# Altium PCB LED Control Board.PcbDoc
Units mm, origin at the board's own origin, x right, y up, seen from the top; angles counter-clockwise.
Board outline 152.4 x 101.6 mm, 2 copper layers (Top Layer, Bottom Layer); 35 components, 138 nets, 342 pads, 0 vias.
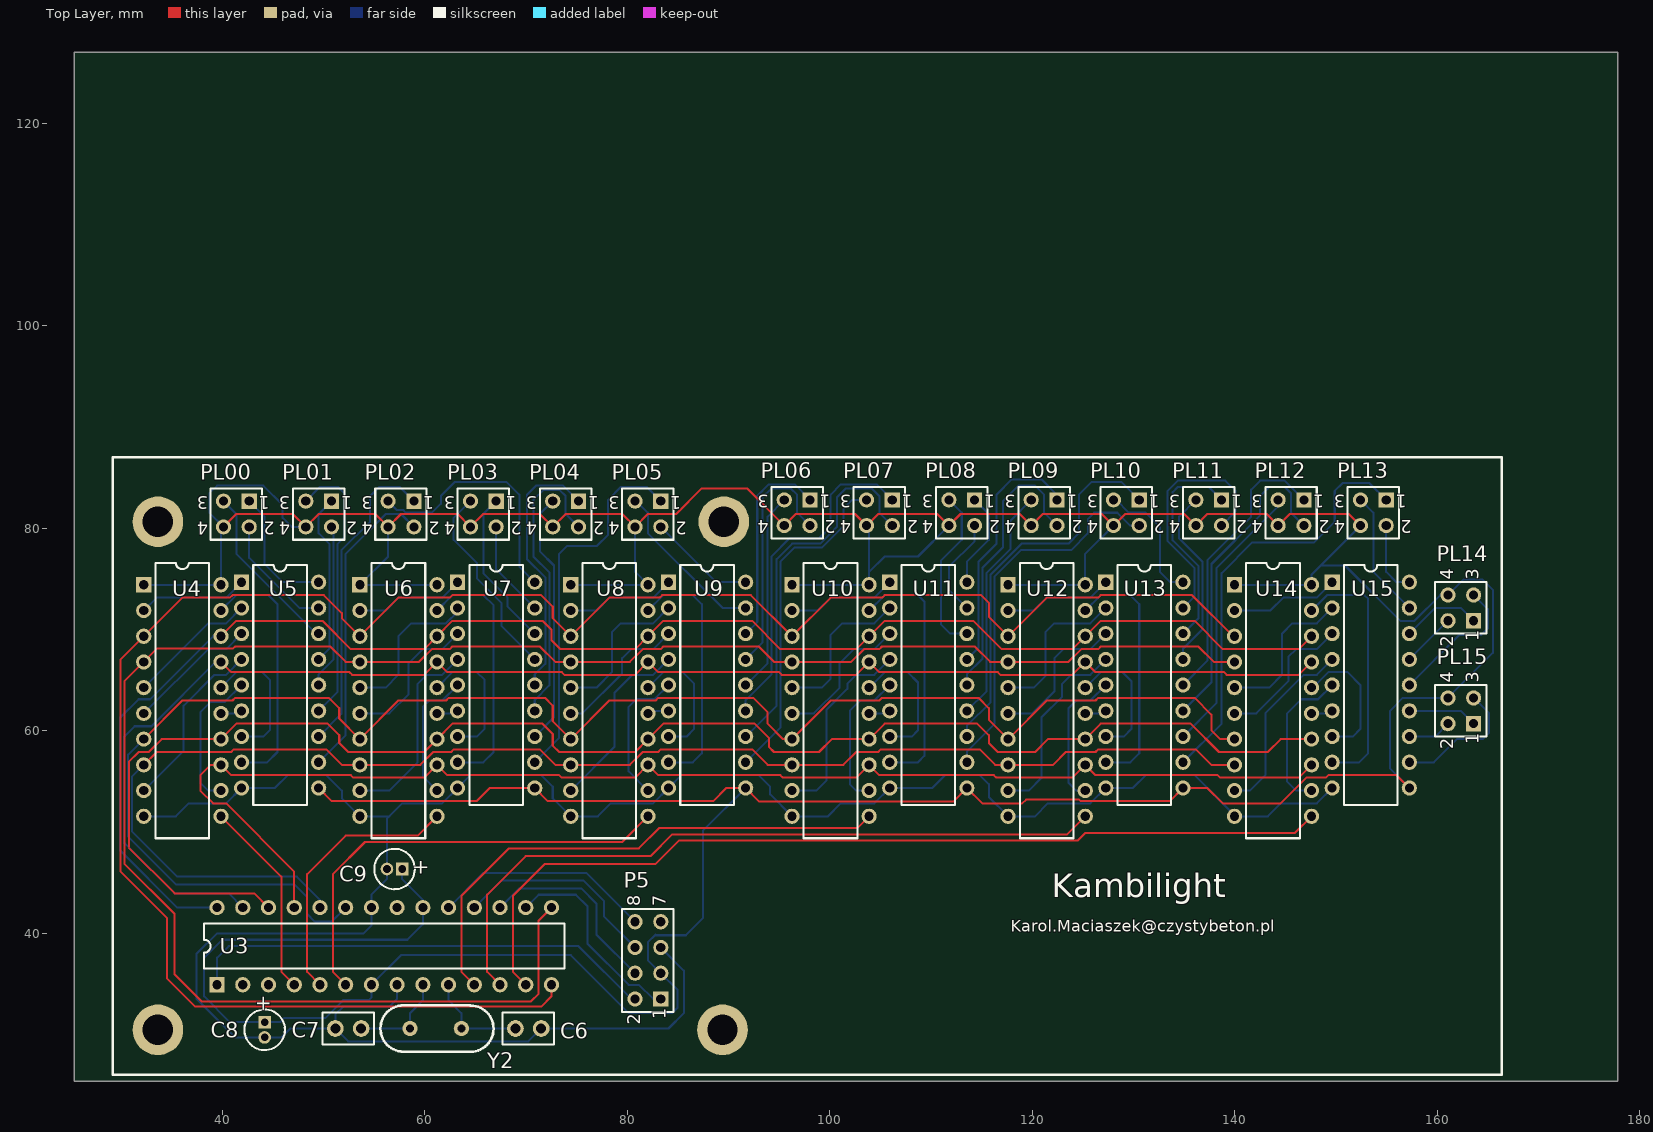
[diagram p0: Top Layer view]
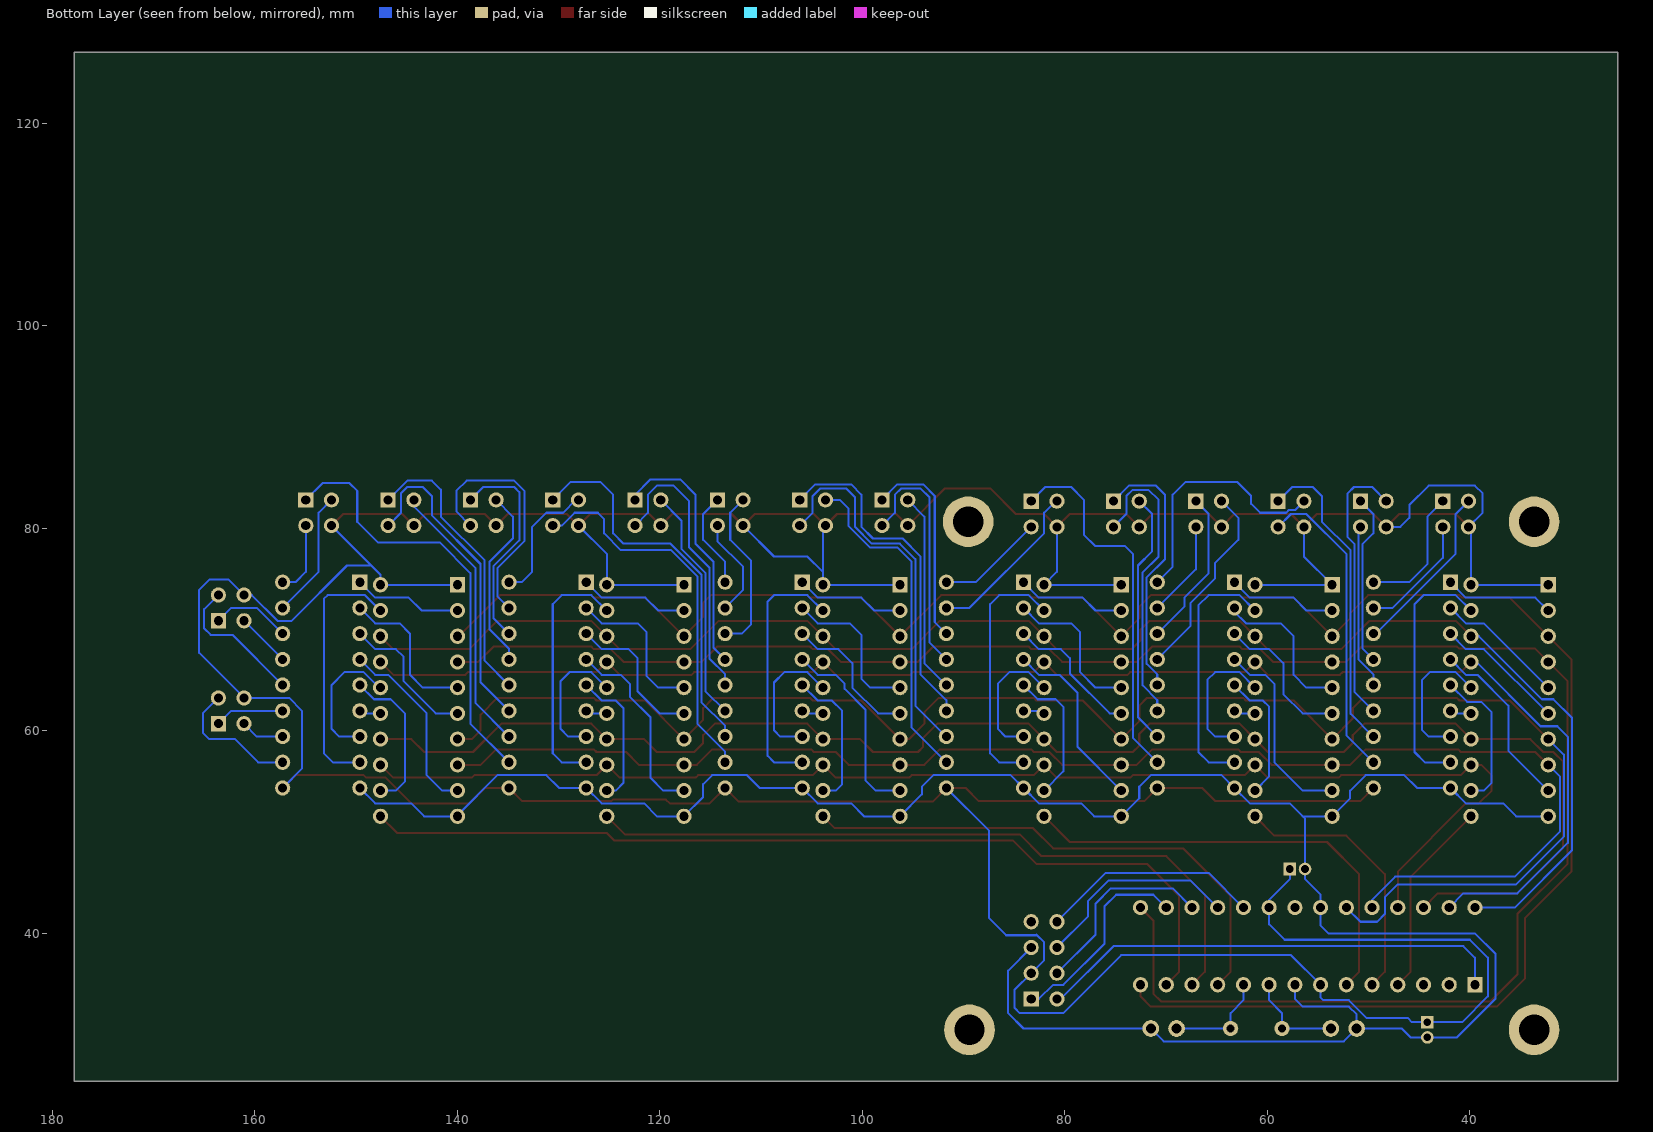
[diagram p1: Bottom Layer view, seen from below]

## Layer stack, top to bottom
Top Layer: signal copper 0.0356
Dielectric: dielectric 0.32, FR-4, Dk 4.8
Bottom Layer: signal copper 0.0356

## Board outline
25.4,25.4 177.8,25.4 177.8,127 25.4,127

## Design rules (kind name [scope] priority, off if disabled: settings)
Clearance [All] p1: gap=0.2
PolygonConnect [All] p1: connectstyle=Relief reliefconductorwidth=0.254 reliefentries=4 polygonreliefangle="90 Angle"
RoomDefinition "LED Control A4-A7" [InComponentClass('LED Control A4-A7')] p1: confinementstyle=ConfineIn formatcopy=TRUE lockcomponents=FALSE outline 89.027,48.387 158.496,48.387 158.496,78.232 89.027,78.232
RoomDefinition "LED Control A0-A3" [InComponentClass('LED Control A0-A3')] p2: confinementstyle=ConfineIn formatcopy=TRUE lockcomponents=FALSE outline 30.226,48.514 115.189,48.514 115.189,78.232 30.226,78.232
RoomDefinition "LED Connectors" [InComponentClass('LED Connectors')] p3: confinementstyle=ConfineIn formatcopy=TRUE lockcomponents=FALSE outline 36.957,57.404 165.735,57.404 165.735,88.011 36.957,88.011
RoomDefinition "LED Circuit" [InComponentClass('LED Circuit')] p4: confinementstyle=ConfineIn formatcopy=TRUE lockcomponents=FALSE outline 31.496,26.416 86.487,26.416 86.487,49.149 31.496,49.149
RoutingVias [All] p1: holewidth=0.711 width=1.27 viastyle="Through Hole" minholewidth=0.711 minwidth=1.27 maxholewidth=0.711 maxwidth=1.27
SilkscreenOverComponentPads [All] p1: minsilkscreentomaskgap=0.254
SolderMaskExpansion [All] p1: expansion=0.102
Width [All] p1: maxlimit=0.2 minlimit=0.1 preferedwidth=0.2
27 further rules are at their usual default settings.

## Classes and differential pairs
component class "USB Circuit": C2 C3 C4 C5 D1 D2 P1 P2 P4 R1 R2 R3 U1 Y1
component class Reset: R4 SW1
component class Power: C1 D3 D4 P3 U2
component class "LED Circuit": C6 C7 C8 C9 P5 U3 Y2
component class "LED Connectors": PL00 PL01 PL02 PL03 PL04 PL05 PL06 PL07 PL08 PL09 PL10 PL11 PL12 PL13 PL14 PL15
component class "LED Control A0-A3": U4 U5 U6 U7 U8 U9 U10 U11
component class "LED Control A4-A7": U12 U13 U14 U15

## Components (designator, comment, footprint, x,y, rotation, side; value= is the part's Value field where it differs from the comment)
C6 "Cap" CAPR2.54-5.1x3.2 70.231,30.607 r0 top
C7 "Cap" CAPR2.54-5.1x3.2 52.451,30.607 r180 top
C8 "Cap Pol1" CAPPR1.5-4x5 44.196,30.48 r270 top
C9 "Cap Pol1" CAPPR1.5-4x5 57.023,46.355 r180 top
P5 "Header 4X2" HDR2X4 83.312,33.528 r90 top
PL00 "Header 2X2" HDR2X2 42.672,82.677 r180 top
PL01 "Header 2X2" HDR2X2 50.8,82.677 r180 top
PL02 "Header 2X2" HDR2X2 58.928,82.677 r180 top
PL03 "Header 2X2" HDR2X2 67.056,82.677 r180 top
PL04 "Header 2X2" HDR2X2 75.184,82.677 r180 top
PL05 "Header 2X2" HDR2X2 83.312,82.677 r180 top
PL06 "Header 2X2" HDR2X2 98.044,82.804 r180 top
PL07 "Header 2X2" HDR2X2 106.172,82.804 r180 top
PL08 "Header 2X2" HDR2X2 114.3,82.804 r180 top
PL09 "Header 2X2" HDR2X2 122.428,82.804 r180 top
PL10 "Header 2X2" HDR2X2 130.556,82.804 r180 top
PL11 "Header 2X2" HDR2X2 138.684,82.804 r180 top
PL12 "Header 2X2" HDR2X2 146.812,82.804 r180 top
PL13 "Header 2X2" HDR2X2 154.94,82.804 r180 top
PL14 "Header 2X2" HDR2X2 163.576,70.866 r90 top
PL15 "Header 2X2" HDR2X2 163.576,60.706 r90 top
U3 "ATmega8L-8PI" 28P3 56.007,38.735 r0 top
U4 "MC74HCT273AN" 738-03 36.068,62.992 r270 top
U5 "ULN2803A" DIP18 45.72,64.516 r270 top
U6 "MC74HCT273AN" 738-03 57.404,62.992 r270 top
U7 "ULN2803A" DIP18 67.056,64.516 r270 top
U8 "MC74HCT273AN" 738-03 78.232,62.992 r270 top
U9 "ULN2803A" DIP18 87.884,64.516 r270 top
U10 "MC74HCT273AN" 738-03 100.076,62.992 r270 top
U11 "ULN2803A" DIP18 109.728,64.516 r270 top
U12 "MC74HCT273AN" 738-03 121.412,62.992 r270 top
U13 "ULN2803A" DIP18 131.064,64.516 r270 top
U14 "MC74HCT273AN" 738-03 143.764,62.992 r270 top
U15 "ULN2803A" DIP18 153.416,64.516 r270 top
Y2 "XTAL" "Crystal Oscillator" 61.087,30.607 r0 top

## Footprints (in the part's own frame and the unit in brackets; to place one, negate y for a bottom-side part, rotate by r counter-clockwise, add the part's x,y. Pads: shape width x height; smd on the part's side, far side on the other; paste and mask are expansions set on the pad)
28P3 [mm] "DIP; 28 Leads; Row Spacing 7.62 mm; Pitch 2.54 mm"
  rect 1.5x1.5 hole 0.9: 1(-16.51,-3.81)
  round 1.5 hole 0.9: 2(-13.97,-3.81) 3(-11.43,-3.81) 4(-8.89,-3.81) 5(-6.35,-3.81) 6(-3.81,-3.81) 7(-1.27,-3.81) 8(1.27,-3.81) 9(3.81,-3.81) 10(6.35,-3.81) 11(8.89,-3.81) 12(11.43,-3.81) 13(13.97,-3.81) 14(16.51,-3.81) 15(16.51,3.81) 16(13.97,3.81) 17(11.43,3.81) 18(8.89,3.81) 19(6.35,3.81) 20(3.81,3.81) 21(1.27,3.81) 22(-1.27,3.81) 23(-3.81,3.81) 24(-6.35,3.81) 25(-8.89,3.81) 26(-11.43,3.81) 27(-13.97,3.81) 28(-16.51,3.81)
  silkscreen extent -17.78,-2.22 17.78,2.22
738-03 [mm] "DIP; 20 Leads; Row Spacing 7.62 mm; Pitch 2.54 mm"
  rect 1.5x1.5 hole 0.9: 1(-11.43,-3.81)
  round 1.5 hole 0.9: 2(-8.89,-3.81) 3(-6.35,-3.81) 4(-3.81,-3.81) 5(-1.27,-3.81) 6(1.27,-3.81) 7(3.81,-3.81) 8(6.35,-3.81) 9(8.89,-3.81) 10(11.43,-3.81) 11(11.43,3.81) 12(8.89,3.81) 13(6.35,3.81) 14(3.81,3.81) 15(1.27,3.81) 16(-1.27,3.81) 17(-3.81,3.81) 18(-6.35,3.81) 19(-8.89,3.81) 20(-11.43,3.81)
  silkscreen extent -13.6,-2.65 13.6,2.65
CAPPR1.5-4x5 [mm] "Capacitor, Electrolytic, Radial; Body 4 x 5 mm (Dia.xH typ); Pin Spacing 1.5 mm (typ)"
  rect 1.25x1.25 hole 0.75: 1(-0.75,0)
  round 1.25 hole 0.75: 2(0.75,0)
  silkscreen extent -2,-2 2,2
CAPR2.54-5.1x3.2 [mm] "Capacitor, Ceramic, Thru-Hole, Dipped Radial; Body 5.1 x 3.2 mm (WxT) Pin Spacing 2.54 mm (typ)"
  round 1.65 hole 1: 1(-1.27,0) 2(1.27,0)
  silkscreen extent -2.55,-1.6 2.55,1.6
"Crystal Oscillator" [mil]
  round 60 hole 30: 1(-100,0) 2(100,0)
  silkscreen extent -215,-91 225,90
DIP18 [mm] "DIP; 18 Leads; Row Spacing 7.62 mm; Pitch 2.54 mm"
  rect 1.5x1.5 hole 0.9: 1(-10.16,-3.81)
  round 1.5 hole 0.9: 2(-7.62,-3.81) 3(-5.08,-3.81) 4(-2.54,-3.81) 5(0,-3.81) 6(2.54,-3.81) 7(5.08,-3.81) 8(7.62,-3.81) 9(10.16,-3.81) 10(10.16,3.81) 11(7.62,3.81) 12(5.08,3.81) 13(2.54,3.81) 14(0,3.81) 15(-2.54,3.81) 16(-5.08,3.81) 17(-7.62,3.81) 18(-10.16,3.81)
  silkscreen extent -11.85,-2.65 11.85,2.65
HDR2X2 [mm] "Connector; Header; 2x2 Position"
  rect 1.5x1.5 hole 0.9: 1(0,0)
  round 1.5 hole 0.9: 2(0,2.54) 3(2.54,0) 4(2.54,2.54)
  silkscreen extent -1.27,-1.27 3.81,3.81
HDR2X4 [mm] "Connector; Header; 4x2 Position"
  rect 1.5x1.5 hole 0.9: 1(0,0)
  round 1.5 hole 0.9: 2(0,2.54) 3(2.54,0) 4(2.54,2.54) 5(5.08,0) 6(5.08,2.54) 7(7.62,0) 8(7.62,2.54)
  silkscreen extent -1.27,-1.27 8.89,3.81

## Part data
C6 C7: "Capacitor"
C8 C9: "Polarized Capacitor (Radial)"
P5: "Header, 4-Pin, Dual row"
PL00 PL01 PL02 PL03 PL04 PL05 PL06 PL07 PL08 PL09 PL10 PL11 PL12 PL13 PL14 PL15: "Header, 2-Pin, Dual row"
U3: "8-Bit AVR Microcontroller with 8K Bytes of In-System Programmable Flash Memory"
U4 U6 U8 U10 U12 U14: "Octal D-Type Flip-Flop with Common Clock and Reset with LSTTL-Compatible Inputs"
U5 U7 U9 U11 U13 U15: "Eight Darlington Array"
Y2: library part "Crystal Oscillator"

## Free pads (board coordinates)
  round 5 hole 3: 0(33.655,30.48) 1(33.655,80.645) 2(89.408,30.48) 3(89.535,80.645)

## Nets (pads, with @x,y where several pads share a name; then routed paths per layer and width w, separated by ;. In a path a pad name is that pad's centre, name@x,y a point inside that pad or via, vN(x,y) a via of type N, cw(c..) or ccw(c..) an arc to the next point about the centre after c; other vN are vias at no path point)
GND: C6.2 C7.2 C8.2 C9.2 P5.5 U3.8 U3.22 U4.10 U5.9 U6.10 U7.9 U8.10 U9.9 U10.10 U11.9 U12.10 U13.9 U14.10 U15.9 | length 240.8
  Bottom Layer w0.2: U4.10 35.433,51.562 36.703,52.832 40.386,52.832 U5.9 45.212,54.356 46.482,55.626 50.292,55.626 51.816,54.102 51.816,53.34 U6.10 56.515,51.562 ; C8.2@44.196,29.718 41.275,29.718 37.465,33.528 37.465,37.973 39.497,40.005 53.975,40.005 54.737,40.767 U3.22 54.737,43.815 56.273,45.351 C9.2 56.273,51.32 56.515,51.562 ; C8.2 45.859,29.73 46.736,30.607 C7.2 ; U3.8 57.277,33.528 56.515,32.766 51.943,32.766 51.181,32.004 C7.2 ; P5.5 85.598,36.322 85.598,32.131 84.074,30.607 C6.2 70.231,29.337 52.451,29.337 C7.2 ; U15.9 148.082,52.832 144.526,52.832 143.256,51.562 U14.10 139.954,51.689 136.017,55.626 131.191,55.626 129.921,54.356 U13.9 125.73,52.832 121.539,52.832 120.269,51.562 U12.10 115.697,53.467 115.697,54.737 114.808,55.626 111.379,55.626 110.109,54.356 U11.9 104.394,52.832 101.092,52.832 99.822,51.562 U10.10 94.107,53.721 94.107,54.483 92.964,55.626 85.344,55.626 U9.9 82.55,52.832 78.359,52.832 77.089,51.562 U8.10 72.644,53.34 72.644,54.483 71.501,55.626 64.516,55.626 U7.9 61.722,52.832 57.785,52.832 56.515,51.562
NetC1_1: 
NetC2_1: 
NetC3_1: 
NetC6_1: C6.1 U3.10 Y2.2 | length 10.2
  Bottom Layer w0.2: U3.10 62.357,33.401 63.627,32.131 Y2.2 C6.1
NetC7_1: C7.1 U3.9 Y2.1 | length 9.7
  Bottom Layer w0.2: C7.1 Y2.1 58.547,32.131 59.817,33.401 U3.9
NetD1_2: 
NetD2_2: 
NetD3_A: 
NetD4_K: 
NetP1_1: 
NetP1_2: 
NetP4_1: 
NetP4_2: 
NetP4_4: 
NetP4_6: 
NetP4_8: 
NetP5_1: P5.1 U3.16 | length 20.3
  Bottom Layer w0.2: U3.16 71.247,43.815 74.93,43.815 76.073,42.672 76.073,38.989 80.137,34.925 81.153,34.925 82.55,33.528 P5.1
NetP5_2: P5.2 U3.1 | length 46.6
  Bottom Layer w0.2: U3.1 39.497,37.592 40.64,38.735 75.184,38.735 80.391,33.528 P5.2
NetP5_4: P5.4 U3.17 | length 19.4
  Bottom Layer w0.2: U3.17 69.342,44.45 75.438,44.45 76.962,42.926 76.962,39.878 P5.4
NetP5_6: P5.6 U3.18 | length 20.6
  Bottom Layer w0.2: U3.18 67.564,45.212 75.692,45.212 77.724,43.18 77.724,41.656 P5.6
NetP5_8: P5.8 U3.19 | length 21.8
  Bottom Layer w0.2: U3.19 65.786,45.974 75.946,45.974 P5.8
NetPL00_1: PL00.1 U5.18 | length 12.9
  Bottom Layer w0.2: PL00.1 44.196,81.153 44.196,76.454 45.974,74.676 U5.18
NetPL00_2: PL00.2 U5.17 | length 12
  Bottom Layer w0.2: PL00.2 42.672,77.089 47.625,72.136 U5.17
NetPL00_3: PL00.3 U5.16 | length 17.1
  Bottom Layer w0.2: PL00.3 41.402,81.407 41.402,77.47 49.276,69.596 U5.16
NetPL01_1: PL01.1 U5.15 | length 17
  Bottom Layer w0.2: U5.15 50.58,68.106 50.58,78.452 49.53,79.502 49.53,81.407 PL01.1
NetPL01_2: PL01.2 U5.14 | length 16
  Bottom Layer w0.2: U5.14 49.53,65.571 50.98,67.021 PL01.2@50.98,79.957
NetPL01_3: PL01.3 U5.13 | length 27.2
  Bottom Layer w0.2: PL01.3 49.657,84.074 51.435,84.074 52.07,83.439 52.07,79.121 51.38,78.431 51.38,63.826 U5.13
NetPL02_1: PL02.1 U5.12 | length 31.1
  Bottom Layer w0.2: U5.12 51.78,61.686 51.78,77.815 54.61,80.645 54.61,83.185 55.499,84.074 57.531,84.074 PL02.1
NetPL02_2: PL02.2 U5.11 | length 30.6
  Bottom Layer w0.2: U5.11 52.197,59.563 52.197,77.47 56.134,81.407 57.658,81.407 PL02.2
NetPL02_3: PL02.3 U7.18 | length 24.9
  Bottom Layer w0.2: PL02.3 57.258,81.807 57.874,81.807 58.147,81.534 60.706,81.534 61.595,82.423 61.595,83.185 62.992,84.582 68.072,84.582 69.342,83.312 69.342,76.2 U7.18
NetPL03_1: PL03.1 U7.16 | length 15.7
  Bottom Layer w0.2: PL03.1 65.786,81.407 65.786,75.565 68.199,73.152 68.199,72.263 U7.16
NetPL03_2: PL03.2 U7.17 | length 9.6
  Bottom Layer w0.2: PL03.2 67.056,75.946 U7.17
NetPL03_3: PL03.3 U7.15 | length 19.6
  Bottom Layer w0.2: PL03.3 62.865,81.026 62.865,78.867 65.151,76.581 65.151,75.057 67.564,72.644 67.564,70.358 U7.15
NetPL04_1: PL04.1 U7.14 | length 26.1
  Bottom Layer w0.2: U7.14 70.866,65.571 71.916,66.621 71.916,75.15 70.104,76.962 70.104,83.312 70.993,84.201 73.66,84.201 PL04.1
NetPL04_2: PL04.2 U7.13 | length 29.5
  Bottom Layer w0.2: U7.13 70.866,63.031 72.316,64.481 72.316,75.639 70.739,77.216 70.739,82.804 71.736,83.801 73.298,83.801 73.914,83.185 73.914,81.407 PL04.2
NetPL04_3: PL04.3 U7.12 | length 25.1
  Bottom Layer w0.2: U7.12 72.771,61.341 72.771,76.327 71.374,77.724 71.374,81.407 PL04.3
NetPL05_1: PL05.1 U7.11 | length 36.9
  Bottom Layer w0.2: U7.11 73.279,59.309 73.279,77.47 74.041,78.232 76.962,78.232 78.105,79.375 78.105,82.804 79.375,84.074 81.915,84.074 PL05.1
NetPL05_2: PL05.2 U9.18 | length 10.6
  Bottom Layer w0.2: PL05.2 88.773,74.676 U9.18
NetPL05_3: PL05.3 U9.17 | length 16.5
  Bottom Layer w0.2: PL05.3 80.899,82.677 82.042,81.534 82.042,79.502 89.408,72.136 U9.17
NetPL06_1: PL06.1 U9.16 | length 20.4
  Bottom Layer w0.2: U9.16 92.837,70.739 92.837,83.185 93.98,84.328 96.52,84.328 PL06.1
NetPL06_2: PL06.2 U9.15 | length 24.3
  Bottom Layer w0.2: U9.15 93.345,68.707 93.345,83.039 94.224,83.918 96.168,83.918 96.774,83.312 96.774,81.534 PL06.2
NetPL06_3: PL06.3 U9.14 | length 19.9
  Bottom Layer w0.2: U9.14 93.853,66.675 93.853,81.153 PL06.3
NetPL07_1: PL07.1 U9.13 | length 33.7
  Bottom Layer w0.2: U9.13 91.694,63.031 94.253,65.59 94.253,77.235 96.012,78.994 98.933,78.994 100.076,80.137 100.076,83.312 101.092,84.328 104.648,84.328 PL07.1
NetPL07_2: PL07.2 U9.12 | length 37.3
  Bottom Layer w0.2: U9.12 94.742,62.484 94.742,76.943 96.285,78.486 99.06,78.486 100.711,80.137 100.711,83.058 101.581,83.928 104.159,83.928 104.902,83.185 104.902,81.534 PL07.2
NetPL07_3: PL07.3 U9.11 | length 33.3
  Bottom Layer w0.2: U9.11 95.142,60.344 95.142,76.727 96.501,78.086 99.226,78.086 101.346,80.206 101.346,81.915 102.235,82.804 PL07.3
NetPL08_1: PL08.1 U11.18 | length 9.6
  Bottom Layer w0.2: U11.18 113.538,76.708 115.697,78.867 115.697,81.407 PL08.1
NetPL08_2: PL08.2 U11.17 | length 9.9
  Bottom Layer w0.2: U11.17 111.76,73.914 111.76,76.2 114.3,78.74 PL08.2
NetPL08_3: PL08.3 U11.16 | length 16.6
  Bottom Layer w0.2: PL08.3 113.03,81.534 113.03,78.867 110.998,76.835 110.998,70.485 111.887,69.596 U11.16
NetPL09_1: PL09.1 U11.15 | length 25.2
  Bottom Layer w0.2: U11.15 114.681,68.199 114.681,76.708 116.459,78.486 116.459,83.312 117.983,84.836 120.904,84.836 122.428,83.312 PL09.1
NetPL09_2: PL09.2 U11.14 | length 28.3
  Bottom Layer w0.2: U11.14 113.538,65.571 115.081,67.114 115.081,76.092 117.094,78.105 117.094,82.677 118.618,84.201 120.269,84.201 121.158,83.312 121.158,81.534 PL09.2
NetPL09_3: PL09.3 U11.13 | length 23.5
  Bottom Layer w0.2: U11.13 115.481,63.919 115.481,75.603 117.856,77.978 117.856,80.772 PL09.3
NetPL10_1: PL10.1 U11.12 | length 38.4
  Bottom Layer w0.2: U11.12 113.538,60.491 115.881,62.834 115.881,75.437 118.93,78.486 123.571,78.486 124.587,79.502 124.587,83.312 125.857,84.582 128.778,84.582 PL10.1
NetPL10_2: PL10.2 U11.11 | length 37.7
  Bottom Layer w0.2: U11.11 113.538,57.951 116.281,60.694 116.281,75.26 118.872,77.851 123.825,77.851 125.476,79.502 125.476,80.899 126.111,81.534 128.397,81.534 129.667,80.264 PL10.2
NetPL10_3: PL10.3 U13.18 | length 12.8
  Bottom Layer w0.2: PL10.3 128.27,82.804 129.54,81.534 131.191,81.534 132.588,80.137 132.588,75.692 133.604,74.676 U13.18
NetPL11_1: PL11.1 U13.16 | length 21.2
  Bottom Layer w0.2: U13.16 136.417,71.139 136.417,76.258 133.858,78.817 133.858,83.566 134.366,84.074 137.414,84.074 PL11.1
NetPL11_2: PL11.2 U13.17 | length 24.7
  Bottom Layer w0.2: U13.17 136.017,73.279 136.017,76.073 133.35,78.74 133.35,83.693 134.366,84.709 139.065,84.709 140.081,83.693 140.081,81.661 PL11.2
NetPL11_3: PL11.3 U13.15 | length 18.2
  Bottom Layer w0.2: U13.15 134.874,68.111 136.817,70.054 136.817,76.67 134.493,78.994 134.493,81.153 PL11.3
NetPL12_1: PL12.1 U13.14 | length 28.5
  Bottom Layer w0.2: U13.14 137.287,66.929 137.287,76.835 141.605,81.153 141.605,83.82 142.494,84.709 144.907,84.709 PL12.1
NetPL12_2: PL12.2 U13.13 | length 31.7
  Bottom Layer w0.2: U13.13 137.687,64.789 137.687,76.473 142.494,81.28 142.494,83.185 143.383,84.074 144.907,84.074 145.542,83.439 145.542,81.534 PL12.2
NetPL12_3: PL12.3 U13.12 | length 27.3
  Bottom Layer w0.2: U13.12 138.176,62.738 138.176,76.073 144.272,82.169 PL12.3
NetPL13_1: PL13.1 U13.11 | length 42.7
  Bottom Layer w0.2: U13.11 138.684,60.706 138.684,75.565 141.732,78.613 147.828,78.613 149.86,80.645 149.86,83.693 150.622,84.455 153.289,84.455 PL13.1
NetPL13_2: PL13.2 U15.18 | length 7.3
  Bottom Layer w0.2: PL13.2 154.94,75.692 155.956,74.676 U15.18
NetPL13_3: PL13.3 U15.17 | length 12.7
  Bottom Layer w0.2: PL13.3 153.67,81.534 153.67,75.692 U15.17
NetPL14_1: PL14.1 U15.16 | length 7.9
  Bottom Layer w0.2: U15.16 159.766,72.136 162.306,72.136 PL14.1
NetPL14_2: PL14.2 U15.15 | length 5.4
  Bottom Layer w0.2: U15.15 PL14.2
NetPL14_3: PL14.3 U15.14 | length 13.9
  Bottom Layer w0.2: U15.14 162.179,69.469 164.338,69.469 164.973,70.104 164.973,72.009 PL14.3
NetPL15_1: PL15.1 U15.13 | length 6.9
  Bottom Layer w0.2: U15.13 162.306,61.976 PL15.1
NetPL15_2: PL15.2 U15.12 | length 4.3
  Bottom Layer w0.2: U15.12 159.766,59.436 PL15.2
NetPL15_3: PL15.3 U15.11 | length 13.1
  Bottom Layer w0.2: U15.11 159.639,56.896 161.925,59.182 164.465,59.182 165.1,59.817 165.1,61.722 PL15.3
NetR1_2: 
NetR2_1: 
NetR3_2: 
NetU3_2: U3.2
NetU3_3: U3.3
NetU3_4: U3.4 U4.11 | length 19.6
  Top Layer w0.2: U4.11 45.847,45.593 45.847,36.195 U3.4
NetU3_5: U3.5 U6.11 | length 26.6
  Top Layer w0.2: U3.5 48.387,36.195 48.387,45.847 52.197,49.657 59.309,49.657 U6.11
NetU3_6: U3.6 U8.11 | length 44.9
  Top Layer w0.2: U3.6 50.927,36.195 50.927,45.847 54.102,49.022 79.502,49.022 U8.11
NetU3_11: U3.11 U10.11 | length 52.8
  Top Layer w0.2: U3.11 63.627,36.195 63.627,43.688 68.326,48.387 81.153,48.387 83.185,50.419 102.743,50.419 U10.11
NetU3_12: U3.12 U12.11 | length 71.7
  Top Layer w0.2: U3.12 66.167,36.195 66.167,43.815 69.977,47.625 82.296,47.625 84.455,49.784 123.444,49.784 U12.11
NetU3_13: U3.13 U14.11 | length 91.4
  Top Layer w0.2: U3.13 68.707,36.195 68.707,43.688 71.882,46.863 82.804,46.863 85.09,49.149 124.46,49.149 125.222,49.911 145.923,49.911 U14.11
NetU3_14: U3.14 U4.3 U6.3 U8.3 U10.3 U12.3 U14.3 | length 203.6
  Top Layer w0.2: U3.14 72.517,33.782 71.501,32.766 37.338,32.766 34.544,35.56 34.544,41.529 29.953,46.12 29.953,67.037 U4.3 36.068,73.152 40.767,73.152 41.021,73.406 50.038,73.406 51.816,71.628 51.816,71.12 U6.3 57.404,73.152 62.484,73.152 62.738,73.406 71.501,73.406 72.644,72.263 72.644,71.12 U8.3 78.232,73.152 83.185,73.152 83.439,73.406 92.202,73.406 U10.3 100.076,73.152 105.156,73.152 105.41,73.406 114.935,73.406 115.697,72.644 115.697,71.247 U12.3 121.412,73.152 126.492,73.152 126.746,73.406 135.763,73.406 139.827,69.342 U14.3
NetU3_15: U3.15 U4.4 U6.4 U8.4 U10.4 U12.4 U14.4 | length 194.1
  Top Layer w0.2: U3.15 71.247,41.275 71.247,34.036 70.485,33.274 37.973,33.274 35.306,35.941 35.306,41.91 30.353,46.863 30.353,64.897 U4.4 33.562,68.106 41.055,68.106 41.275,68.326 50.673,68.326 52.197,66.802 U6.4 59.436,66.802 60.706,68.072 62.484,68.072 62.738,68.326 71.374,68.326 72.898,66.802 U8.4 80.264,66.802 81.534,68.072 83.312,68.072 83.566,68.326 92.964,68.326 94.488,66.802 U10.4 102.108,66.802 103.378,68.072 104.902,68.072 105.156,68.326 114.3,68.326 115.824,66.802 U12.4 123.571,66.802 124.841,68.072 126.492,68.072 126.746,68.326 136.398,68.326 137.922,66.802 U14.4
NetU3_23: U3.23 U4.7 U6.7 U8.7 U10.7 U12.7 U14.7 | length 165
  Top Layer w0.2: U4.7 36.068,62.992 41.021,62.992 41.275,63.246 50.546,63.246 51.562,62.23 51.562,61.214 U6.7 57.404,62.992 62.103,62.992 62.357,63.246 71.882,63.246 72.644,62.484 72.644,60.96 U8.7 78.232,62.992 82.804,62.992 83.058,63.246 92.456,63.246 93.853,61.849 93.853,60.706 95.377,59.182 U10.7 100.076,62.992 104.902,62.992 105.156,63.246 114.681,63.246 115.697,62.23 115.697,61.087 U12.7 121.412,62.992 126.238,62.992 126.492,63.246 136.017,63.246 137.668,61.595 137.668,60.071 138.557,59.182 U14.7
  Bottom Layer w0.2: U4.7 30.715,57.639 30.715,49.549 35.433,44.831 47.117,44.831 48.387,43.561 48.387,41.91 49.149,41.148 50.8,41.148 U3.23
NetU3_24: U3.24 U4.8 U6.8 U8.8 U10.8 U12.8 U14.8 | length 143.4
  Top Layer w0.2: U4.8 33.528,57.912 40.894,57.912 41.148,58.166 50.292,58.166 51.816,56.642 U6.8 59.563,56.642 60.833,57.912 62.611,57.912 62.865,58.166 71.374,58.166 72.898,56.642 U8.8 ; U8.8@74.295,56.769 U8.8 ; U14.8 137.668,56.642 136.144,58.166 126.492,58.166 126.238,57.912 123.317,57.912 122.047,56.642 U12.8 116.332,56.642 114.808,58.166 105.029,58.166 104.775,57.912 102.616,57.912 101.346,56.642 U10.8 93.853,56.642 92.329,58.166 83.312,58.166 83.058,57.912 81.534,57.912 80.264,56.642 U8.8
  Bottom Layer w0.2: U4.8 31.115,55.499 31.115,50.038 35.56,45.593 47.371,45.593 49.657,43.307 U3.24
NetU3_25: U3.25 U4.13 U6.13 U8.13 U10.13 U12.13 U14.13 | length 133.1
  Top Layer w0.2: U3.25 47.117,46.101 40.386,52.832 39.116,52.832 37.846,54.102 37.846,55.626 38.862,56.642 U4.13 40.894,55.626 52.705,55.626 52.959,55.372 59.944,55.372 U6.13 62.23,55.626 73.279,55.626 73.533,55.372 80.772,55.372 U8.13 83.058,55.626 95.123,55.626 95.377,55.372 102.616,55.372 U10.13 104.902,55.626 116.205,55.626 116.459,55.372 123.952,55.372 U12.13 126.238,55.626 138.303,55.626 138.557,55.372 146.304,55.372 U14.13
NetU3_26: U3.26 U4.14 U6.14 U8.14 U10.14 U12.14 U14.14 | length 156.1
  Top Layer w0.2: 30.797,48.45 35.306,43.942 43.18,43.942 U3.26 ; 30.797,48.578 30.797,56.959 31.75,57.912 32.766,57.912 34.036,59.182 U4.14 41.402,60.706 50.419,60.706 51.562,59.563 51.562,58.801 52.451,57.912 59.944,57.912 U6.14 62.738,60.706 71.628,60.706 72.644,59.69 72.644,58.547 73.279,57.912 80.772,57.912 U8.14 83.566,60.706 92.583,60.706 93.98,59.309 93.98,58.42 94.488,57.912 98.933,57.912 100.203,59.182 U10.14 105.41,60.706 114.554,60.706 115.697,59.563 115.697,58.801 116.586,57.912 120.269,57.912 121.539,59.182 U12.14 126.746,60.706 135.636,60.706 138.43,57.912 143.256,57.912 144.526,59.182 U14.14 U14.14@147.574,59.055
NetU3_27: U3.27 U4.17 U6.17 U8.17 U10.17 U12.17 U14.17 | length 150.4
  Top Layer w0.2: U4.17 40.894,65.786 52.578,65.786 52.832,65.532 59.944,65.532 U6.17 62.23,65.786 73.533,65.786 73.787,65.532 80.772,65.532 U8.17 83.058,65.786 94.996,65.786 95.25,65.532 102.616,65.532 U10.17 104.902,65.786 116.586,65.786 116.84,65.532 123.952,65.532 U12.17 126.238,65.786 138.938,65.786 139.192,65.532 146.304,65.532 U14.17
  Bottom Layer w0.2: U4.17 39.37,66.802 33.02,60.452 31.369,60.452 30.315,59.398 30.315,48.933 35.306,43.942 40.64,43.942 U3.27
NetU3_28: U3.28 U4.18 U6.18 U8.18 U10.18 U12.18 U14.18 | length 158.1
  Top Layer w0.2: U4.18 41.402,70.866 49.911,70.866 52.705,68.072 59.944,68.072 U6.18 62.738,70.866 71.628,70.866 72.517,69.977 72.517,68.961 73.406,68.072 80.772,68.072 U8.18 83.566,70.866 92.329,70.866 95.123,68.072 102.616,68.072 U10.18 105.41,70.866 114.173,70.866 116.967,68.072 123.952,68.072 U12.18 126.746,70.866 136.017,70.866 138.811,68.072 146.304,68.072 U14.18
  Bottom Layer w0.2: 29.915,48.19 29.915,61.284 31.75,63.119 32.893,63.119 39.116,69.342 U4.18 ; 29.972,48.133 35.56,42.545 U3.28
NetU4_2: U4.2 U5.1 | length 10.8
  Bottom Layer w0.2: U4.2 33.528,73.152 40.386,73.152 U5.1
NetU4_5: U4.5 U5.2 | length 12.9
  Bottom Layer w0.2: U4.5 38.608,70.612 40.386,70.612 U5.2
NetU4_6: U4.6 U5.3 | length 12.9
  Bottom Layer w0.2: U4.6 38.608,68.072 40.386,68.072 U5.3
NetU4_9: U4.9 U5.4 | length 17.6
  Bottom Layer w0.2: U4.9 36.195,58.039 36.195,62.484 39.243,65.532 40.386,65.532 U5.4
NetU4_12: U4.12 U5.5 | length 14.5
  Bottom Layer w0.2: U4.12 38.608,54.102 37.846,54.864 37.846,61.849 38.862,62.865 40.259,62.865 U5.5
NetU4_15: U4.15 U5.6 | length 2.1
  Bottom Layer w0.2: U4.15 41.656,61.722 U5.6
NetU4_16: U4.16 U5.7 | length 13.8
  Bottom Layer w0.2: U4.16 41.402,65.786 43.942,65.786 44.704,65.024 44.704,60.071 44.069,59.436 U5.7
NetU4_19: U4.19 U5.8 | length 25.2
  Bottom Layer w0.2: U4.19 41.402,73.406 44.577,73.406 45.466,72.517 45.466,57.912 44.45,56.896 U5.8
NetU6_2: U6.2 U7.1 | length 10.8
  Bottom Layer w0.2: U6.2 56.134,71.882 57.404,73.152 61.722,73.152 U7.1
NetU6_5: U6.5 U7.2 | length 15.4
  Bottom Layer w0.2: U6.5 56.134,64.262 57.404,65.532 57.404,69.342 58.674,70.612 62.103,70.612 63.246,71.755 U7.2
NetU6_6: U6.6 U7.3 | length 14.7
  Bottom Layer w0.2: U6.6 56.515,61.722 58.42,63.627 58.42,66.675 59.817,68.072 61.722,68.072 U7.3
NetU6_9: U6.9 U7.4 | length 19.6
  Bottom Layer w0.2: U6.9 56.515,54.102 59.309,56.896 59.309,64.643 60.198,65.532 61.722,65.532 U7.4
NetU6_12: U6.12 U7.5 | length 13.2
  Bottom Layer w0.2: U6.12 59.817,55.499 59.817,62.357 60.452,62.992 61.722,62.992 U7.5
NetU6_15: U6.15 U7.6 | length 2.1
  Bottom Layer w0.2: U6.15 62.992,61.722 U7.6
NetU6_16: U6.16 U7.7 | length 13.5
  Bottom Layer w0.2: U6.16 62.738,65.786 65.151,65.786 65.913,65.024 65.913,60.198 65.151,59.436 U7.7
NetU6_19: U6.19 U7.8 | length 25.1
  Bottom Layer w0.2: U6.19 62.738,73.406 65.786,73.406 66.802,72.39 66.802,57.912 65.786,56.896 U7.8
NetU8_2: U8.2 U9.1 | length 10.8
  Bottom Layer w0.2: U8.2 76.962,71.882 78.232,73.152 82.55,73.152 U9.1
NetU8_5: U8.5 U9.2 | length 15.2
  Bottom Layer w0.2: U8.5 76.962,64.262 78.486,65.786 78.486,69.723 79.375,70.612 82.55,70.612 U9.2
NetU8_6: U8.6 U9.3 | length 13.8
  Bottom Layer w0.2: U8.6 75.565,61.722 79.502,65.659 79.502,67.183 80.391,68.072 82.55,68.072 U9.3
NetU8_9: U8.9 U9.4 | length 18.1
  Bottom Layer w0.2: U8.9 78.74,58.42 78.74,63.754 80.518,65.532 82.55,65.532 U9.4
NetU8_12: U8.12 U9.5 | length 13.9
  Bottom Layer w0.2: U8.12 80.137,56.007 80.137,62.357 80.899,63.119 82.677,63.119 U9.5
NetU8_15: U8.15 U9.6 | length 2.1
  Bottom Layer w0.2: U8.15 82.296,61.976 U9.6
NetU8_16: U8.16 U9.7 | length 13
  Bottom Layer w0.2: U8.16 83.566,65.786 85.471,65.786 86.614,64.643 86.614,60.198 85.852,59.436 U9.7
NetU8_19: U8.19 U9.8 | length 24.7
  Bottom Layer w0.2: U8.19 83.566,73.406 86.487,73.406 87.376,72.517 87.376,57.785 86.487,56.896 U9.8
NetU10_2: U10.2 U11.1 | length 10.8
  Bottom Layer w0.2: U10.2 98.806,71.882 100.076,73.152 104.394,73.152 U11.1
NetU10_5: U10.5 U11.2 | length 15.4
  Bottom Layer w0.2: U10.5 99.187,64.262 100.076,65.151 100.076,69.469 101.219,70.612 104.394,70.612 U11.2
NetU10_6: U10.6 U11.3 | length 14.3
  Bottom Layer w0.2: U10.6 98.425,61.722 100.965,64.262 100.965,66.675 102.362,68.072 104.394,68.072 U11.3
NetU10_9: U10.9 U11.4 | length 19.4
  Bottom Layer w0.2: U10.9 98.679,54.102 99.695,55.118 99.695,62.103 101.727,64.135 101.727,64.643 102.616,65.532 104.394,65.532 U11.4
NetU10_12: U10.12 U11.5 | length 14.4
  Bottom Layer w0.2: U10.12 102.616,54.102 101.981,54.737 101.981,61.976 102.997,62.992 104.394,62.992 U11.5
NetU10_15: U10.15 U11.6 | length 2.1
  Bottom Layer w0.2: U10.15 105.664,61.722 U11.6
NetU10_16: U10.16 U11.7 | length 13.6
  Bottom Layer w0.2: U10.16 105.41,65.786 107.696,65.786 108.712,64.77 108.712,60.071 108.077,59.436 U11.7
NetU10_19: U10.19 U11.8 | length 25.3
  Bottom Layer w0.2: U10.19 105.41,73.406 108.712,73.406 109.347,72.771 109.347,57.531 108.712,56.896 U11.8
NetU12_2: U12.2 U13.1 | length 10.8
  Bottom Layer w0.2: U12.2 120.142,71.882 121.412,73.152 125.73,73.152 U13.1
NetU12_5: U12.5 U13.2 | length 15.4
  Bottom Layer w0.2: U12.5 120.142,64.262 121.285,65.405 121.285,69.723 122.174,70.612 125.73,70.612 U13.2
NetU12_6: U12.6 U13.3 | length 14.8
  Bottom Layer w0.2: U12.6 120.015,61.722 122.174,63.881 122.174,67.183 123.063,68.072 125.73,68.072 U13.3
NetU12_9: U12.9 U13.4 | length 19.3
  Bottom Layer w0.2: U12.9 119.634,54.102 120.904,55.372 120.904,61.341 122.936,63.373 122.936,64.643 123.825,65.532 125.73,65.532 U13.4
NetU12_12: U12.12 U13.5 | length 14
  Bottom Layer w0.2: U12.12 124.333,54.102 123.571,54.864 123.571,62.23 124.333,62.992 125.73,62.992 U13.5
NetU12_15: U12.15 U13.6 | length 2.1
  Bottom Layer w0.2: U12.15 127,61.722 U13.6
NetU12_16: U12.16 U13.7 | length 13.1
  Bottom Layer w0.2: U12.16 126.746,65.786 128.905,65.786 129.794,64.897 129.794,60.198 129.032,59.436 U13.7
NetU12_19: U12.19 U13.8 | length 24.7
  Bottom Layer w0.2: U12.19 126.746,73.406 129.667,73.406 130.556,72.517 130.556,57.785 129.667,56.896 U13.8
NetU14_2: U14.2 U15.1 | length 10.8
  Bottom Layer w0.2: U14.2 143.51,71.882 144.78,73.152 148.082,73.152 U15.1
NetU14_5: U14.5 U15.2 | length 15.3
  Bottom Layer w0.2: U14.5 143.383,64.262 144.653,65.532 144.653,69.596 145.669,70.612 148.082,70.612 U15.2
NetU14_6: U14.6 U15.3 | length 14.3
  Bottom Layer w0.2: U14.6 142.113,61.722 145.288,64.897 145.288,67.31 146.05,68.072 148.082,68.072 U15.3
NetU14_9: U14.9 U15.4 | length 18.6
  Bottom Layer w0.2: U14.9 141.478,54.102 143.002,55.626 143.002,61.722 146.812,65.532 148.082,65.532 U15.4
NetU14_12: U14.12 U15.5 | length 15.1
  Bottom Layer w0.2: U14.12 146.05,54.102 145.161,54.991 145.161,61.722 146.558,63.119 148.209,63.119 U15.5
NetU14_15: U14.15 U15.6 | length 2.1
  Bottom Layer w0.2: U14.15 149.352,61.722 U15.6
NetU14_16: U14.16 U15.7 | length 13.4
  Bottom Layer w0.2: U14.16 147.701,64.262 149.225,65.786 151.13,65.786 152.4,64.516 152.4,60.198 151.638,59.436 U15.7
NetU14_19: U14.19 U15.8 | length 25.5
  Bottom Layer w0.2: U14.19 149.098,73.406 152.781,73.406 153.162,73.025 153.162,57.785 152.273,56.896 U15.8
VCC: C8.1 C9.1 P5.3 PL00.4 PL01.4 PL02.4 PL03.4 PL04.4 PL05.4 PL06.4 PL07.4 PL08.4 PL09.4 PL10.4 PL11.4 PL12.4 PL13.4 PL14.4 PL15.4 U3.7 U3.20 U4.1 U4.20 U5.10 U6.1 U6.20 U7.10 U8.1 U8.20 U9.10 U10.1 U10.20 U11.10 U12.1 U12.20 U13.10 U14.1 U14.20 U15.10 | length 517.4
  Top Layer w0.2: PL00.4 41.402,81.407 46.99,81.407 PL01.4 49.53,81.407 55.118,81.407 PL02.4 57.658,81.407 63.246,81.407 PL03.4 65.786,81.407 71.374,81.407 PL04.4 73.914,81.407 79.502,81.407 PL05.4 82.042,81.407 84.836,81.407 87.376,83.947 91.821,83.947 PL06.4 96.647,81.407 102.489,81.407 PL07.4 104.775,81.407 110.617,81.407 PL08.4 112.903,81.407 118.745,81.407 PL09.4 121.031,81.407 126.873,81.407 PL10.4 129.159,81.407 135.001,81.407 PL11.4 137.287,81.407 143.129,81.407 PL12.4 145.415,81.407 151.257,81.407 PL13.4 ; U5.10 50.834,53.052 65.117,53.052 66.421,54.356 U7.10 72.17,53.052 88.485,53.052 89.789,54.356 U9.10 93.038,53.012 112.194,53.012 U11.10 115.062,52.832 118.999,52.832 119.38,53.213 124.626,53.213 124.787,53.052 133.57,53.052 U13.10 137.287,54.356 138.811,52.832 144.526,52.832 147.066,55.372 148.971,55.372 149.225,55.626 155.956,55.626 U15.10
  Bottom Layer w0.2: U4.1 U4.20 39.878,79.883 PL00.4 38.735,81.534 38.735,83.439 39.497,84.201 44.069,84.201 45.974,82.296 45.974,81.026 46.863,80.137 PL01.4 ; PL02.4@56.388,80.01 56.388,77.216 U6.1 U6.20 ; C9.1 57.773,45.351 59.817,43.307 U3.20 59.817,40.894 58.293,39.37 40.005,39.37 38.227,37.592 38.227,33.782 40.767,31.242 45.72,31.242 46.101,31.623 50.165,31.623 51.943,33.401 54.483,33.401 54.737,33.655 U3.7 57.658,37.846 74.422,37.846 80.137,32.131 84.455,32.131 84.963,32.639 84.963,34.417 P5.3 82.042,37.338 82.042,39.116 82.74,39.814 ; U8.1 U8.20 80.772,75.692 PL05.4 ; 82.804,39.878 82.74,39.814 ; U9.10 87.503,50.165 87.503,41.529 85.788,39.814 82.74,39.814 ; U10.1 U10.20 103.886,75.692 ; PL07.4 103.886,80.01 103.886,75.692 ; PL08.4 108.712,77.216 105.41,77.216 103.886,75.692 ; U12.1 U12.20 125.222,77.47 PL10.4 ; U14.1 U14.20 147.574,75.438 148.463,76.327 ; PL13.4 148.463,76.327 ; U15.10 155.321,56.261 155.321,61.976 156.591,63.246 PL15.4 165.481,67.691 165.481,73.914 164.465,74.93 162.56,74.93 PL14.4 160.274,73.406 157.734,70.866 156.337,70.866 150.876,76.327 148.463,76.327
pads on no net: P5.7 U3.21

## Silkscreen, mask and mechanical layers (free items; w line width, h text height)
Top Overlay:
  lines w0.254: 29.21,26.035 29.21,86.995 166.37,86.995 166.37,26.035 29.21,26.035
  text "Kambilight" at 121.92,42.799 h4
  text "Karol.Maciaszek@czystybeton.pl" at 117.856,39.751 h2

## Text inside footprints (layer, text, board x,y; h text height)
C8: Top Overlay "+" at 43.446,33.955 h1.5 r270
C9: Top Overlay "+" at 60.498,47.105 h1.5 r180
P5: Top Overlay "2" at 81.28,30.988 h1.27 r90; Top Overlay "1" at 83.82,31.496 h1.27 r90; Top Overlay "7" at 83.82,42.672 h1.27 r90; Top Overlay "8" at 81.28,42.672 h1.27 r90
PL00: Top Overlay "1" at 44.704,83.185 h1.27 r180; Top Overlay "2" at 45.212,80.645 h1.27 r180; Top Overlay "4" at 38.608,80.645 h1.27 r180; Top Overlay "3" at 38.608,83.185 h1.27 r180
PL01: Top Overlay "1" at 52.832,83.185 h1.27 r180; Top Overlay "2" at 53.34,80.645 h1.27 r180; Top Overlay "4" at 46.736,80.645 h1.27 r180; Top Overlay "3" at 46.736,83.185 h1.27 r180
PL02: Top Overlay "1" at 60.96,83.185 h1.27 r180; Top Overlay "2" at 61.468,80.645 h1.27 r180; Top Overlay "4" at 54.864,80.645 h1.27 r180; Top Overlay "3" at 54.864,83.185 h1.27 r180
PL03: Top Overlay "1" at 69.088,83.185 h1.27 r180; Top Overlay "2" at 69.596,80.645 h1.27 r180; Top Overlay "4" at 62.992,80.645 h1.27 r180; Top Overlay "3" at 62.992,83.185 h1.27 r180
PL04: Top Overlay "1" at 77.216,83.185 h1.27 r180; Top Overlay "2" at 77.724,80.645 h1.27 r180; Top Overlay "4" at 71.12,80.645 h1.27 r180; Top Overlay "3" at 71.12,83.185 h1.27 r180
PL05: Top Overlay "1" at 85.344,83.185 h1.27 r180; Top Overlay "2" at 85.852,80.645 h1.27 r180; Top Overlay "4" at 79.248,80.645 h1.27 r180; Top Overlay "3" at 79.248,83.185 h1.27 r180
PL06: Top Overlay "1" at 100.076,83.312 h1.27 r180; Top Overlay "2" at 100.584,80.772 h1.27 r180; Top Overlay "4" at 93.98,80.772 h1.27 r180; Top Overlay "3" at 93.98,83.312 h1.27 r180
PL07: Top Overlay "1" at 108.204,83.312 h1.27 r180; Top Overlay "2" at 108.712,80.772 h1.27 r180; Top Overlay "4" at 102.108,80.772 h1.27 r180; Top Overlay "3" at 102.108,83.312 h1.27 r180
PL08: Top Overlay "1" at 116.332,83.312 h1.27 r180; Top Overlay "2" at 116.84,80.772 h1.27 r180; Top Overlay "4" at 110.236,80.772 h1.27 r180; Top Overlay "3" at 110.236,83.312 h1.27 r180
PL09: Top Overlay "1" at 124.46,83.312 h1.27 r180; Top Overlay "2" at 124.968,80.772 h1.27 r180; Top Overlay "4" at 118.364,80.772 h1.27 r180; Top Overlay "3" at 118.364,83.312 h1.27 r180
PL10: Top Overlay "1" at 132.588,83.312 h1.27 r180; Top Overlay "2" at 133.096,80.772 h1.27 r180; Top Overlay "4" at 126.492,80.772 h1.27 r180; Top Overlay "3" at 126.492,83.312 h1.27 r180
PL11: Top Overlay "1" at 140.716,83.312 h1.27 r180; Top Overlay "2" at 141.224,80.772 h1.27 r180; Top Overlay "4" at 134.62,80.772 h1.27 r180; Top Overlay "3" at 134.62,83.312 h1.27 r180
PL12: Top Overlay "1" at 148.844,83.312 h1.27 r180; Top Overlay "2" at 149.352,80.772 h1.27 r180; Top Overlay "4" at 142.748,80.772 h1.27 r180; Top Overlay "3" at 142.748,83.312 h1.27 r180
PL13: Top Overlay "1" at 156.972,83.312 h1.27 r180; Top Overlay "2" at 157.48,80.772 h1.27 r180; Top Overlay "4" at 150.876,80.772 h1.27 r180; Top Overlay "3" at 150.876,83.312 h1.27 r180
PL14: Top Overlay "1" at 164.084,68.834 h1.27 r90; Top Overlay "2" at 161.544,68.326 h1.27 r90; Top Overlay "4" at 161.544,74.93 h1.27 r90; Top Overlay "3" at 164.084,74.93 h1.27 r90
PL15: Top Overlay "1" at 164.084,58.674 h1.27 r90; Top Overlay "2" at 161.544,58.166 h1.27 r90; Top Overlay "4" at 161.544,64.77 h1.27 r90; Top Overlay "3" at 164.084,64.77 h1.27 r90